# Altium PCB PCB1.PcbDoc
Units mm, origin at the board's own origin, x right, y up, seen from the top; angles counter-clockwise.
Board outline 25 x 15 mm, 4 copper layers (Top Layer, GND, VCC, Bottom Layer), stack 0.602 mm thick; 14 components, 27 nets, 98 pads, 50 vias.
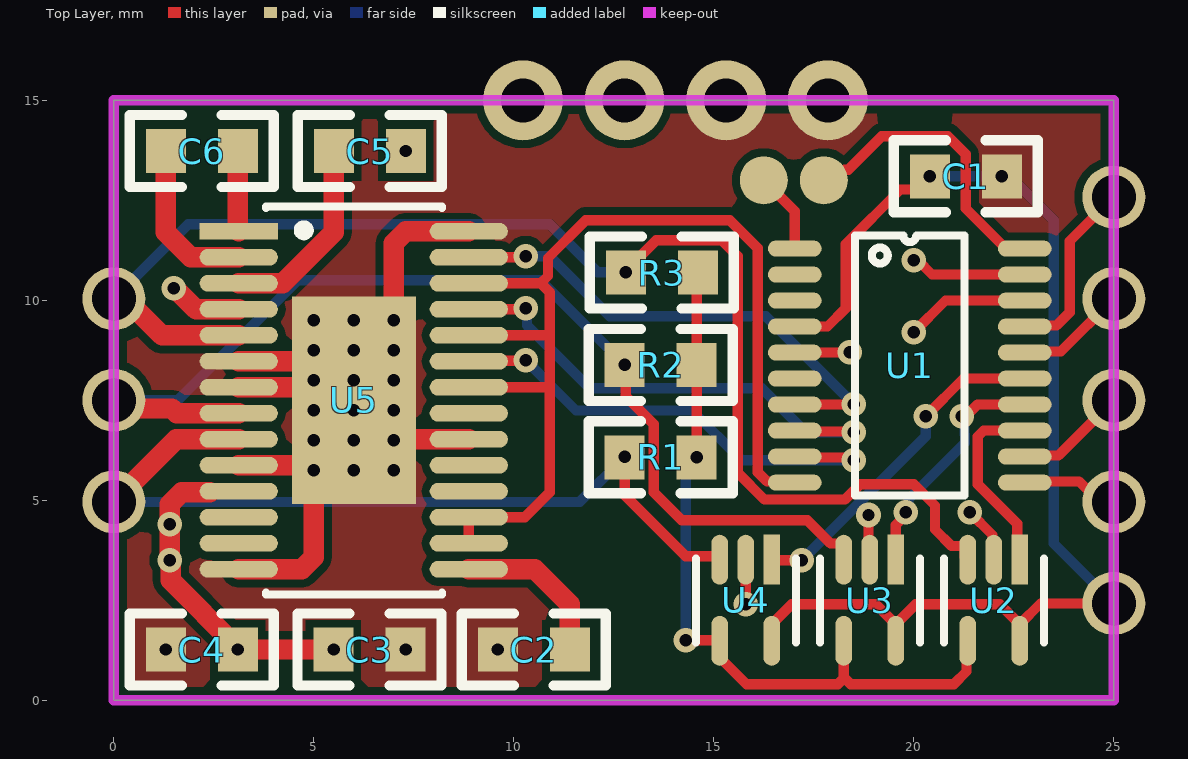
[diagram p0: Top Layer view]
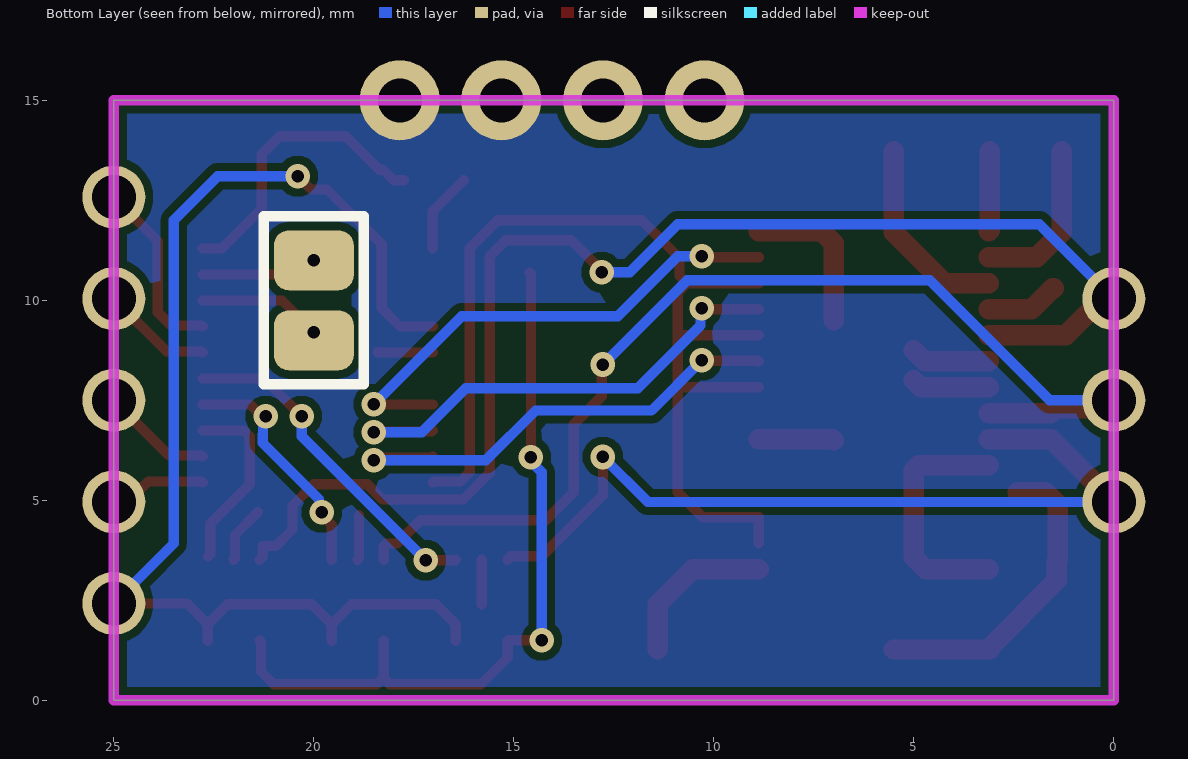
[diagram p1: Bottom Layer view, seen from below]
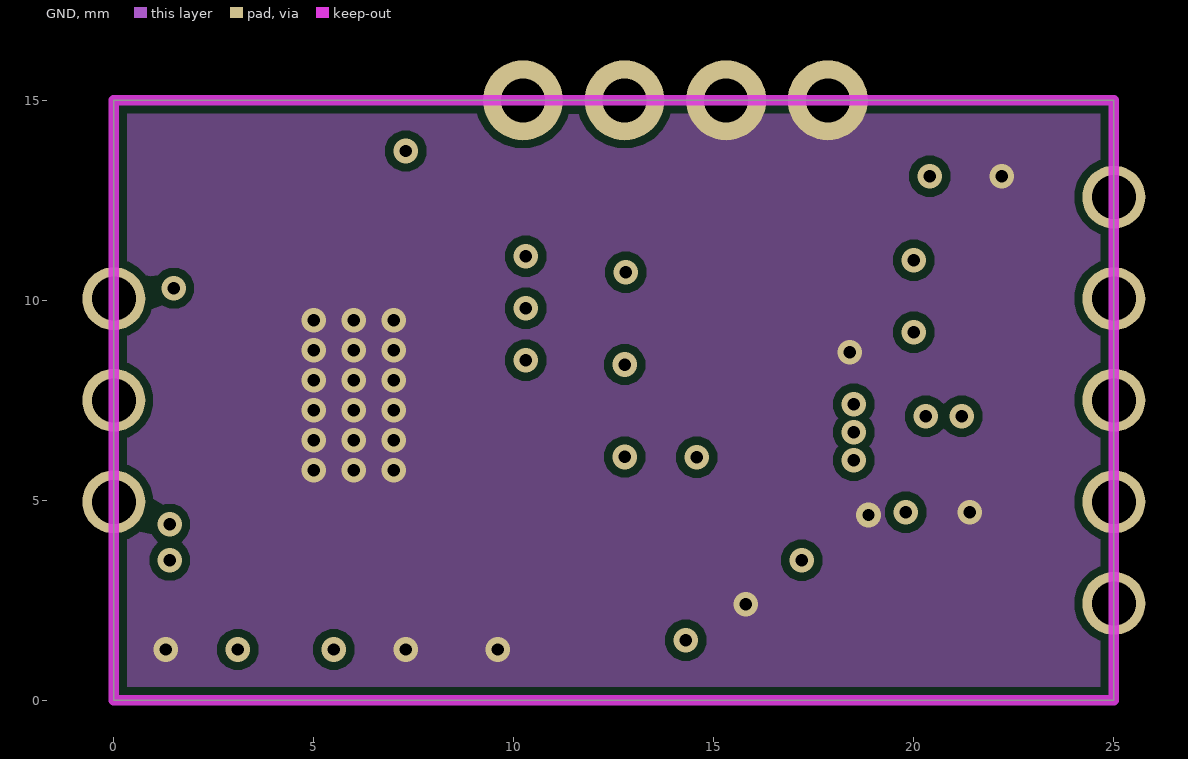
[diagram p2: GND]
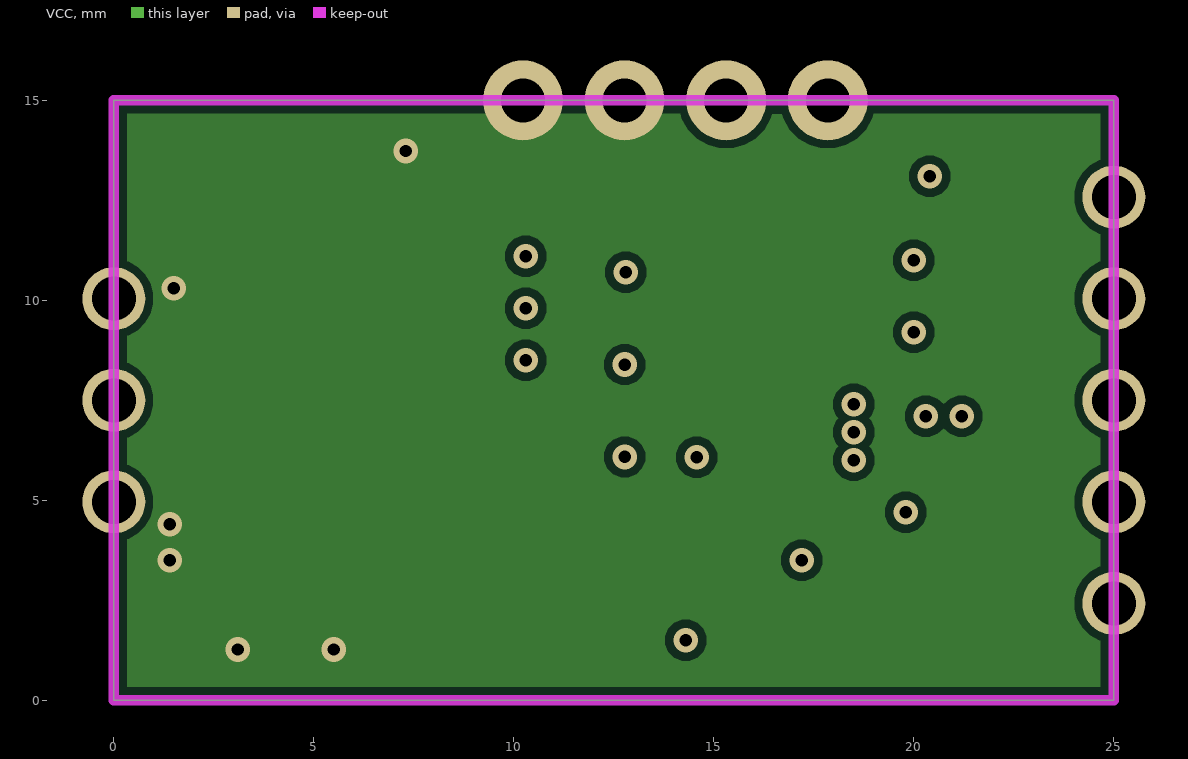
[diagram p3: VCC]
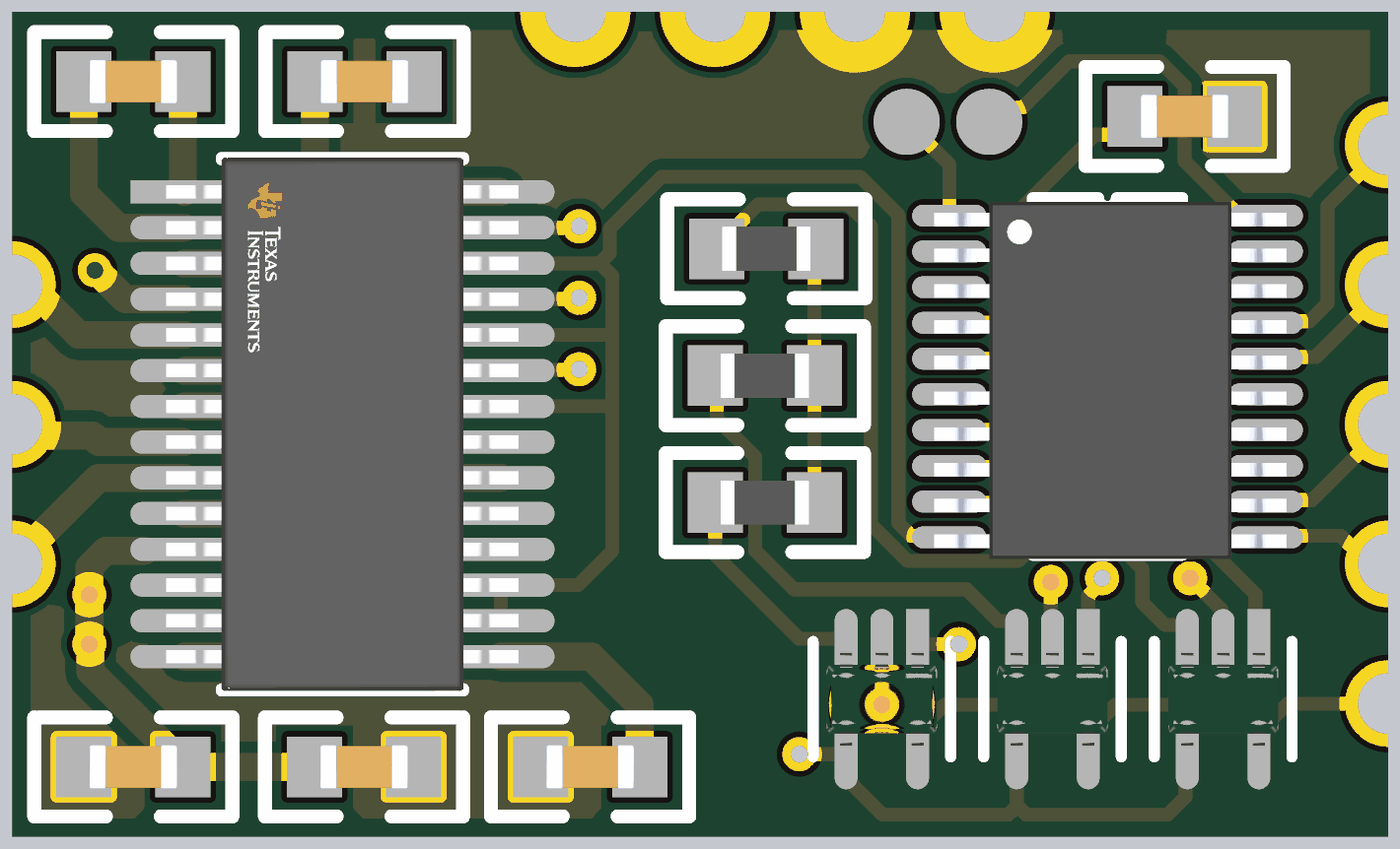
[diagram p4: 3D render of the assembled board from above, using the file's embedded part models]

## Layer stack, top to bottom
Top Solder: solder mask 0.0102, Solder Resist, Dk 3.5
Top Layer: signal copper 0.035
Dielectric 2: prepreg 0.0711, PP-006, Dk 4.1
GND: signal copper 0.035
Dielectric 1: dielectric 0.32, FR-4, Dk 4.8
VCC: signal copper 0.035
Dielectric 3: prepreg 0.0711, PP-006, Dk 4.1
Bottom Layer: signal copper 0.035
Bottom Solder: solder mask 0.0102, Solder Resist, Dk 3.5

## Board outline
0,0 0,15 25,15 25,0

## Design rules (kind name [scope] priority, off if disabled: settings)
Clearance [All] p1: gap=0 ignorepadtopadclearanceinfootprint=FALSE except(0.1: Arc-Arc Arc-Track Arc-SMDPad Arc-Via Track-Track Track-SMDPad Track-Via; 0.2: Arc-Fill Arc-Poly Arc-Region Track-Fill Track-Poly Track-Region SMDPad-Fill SMDPad-Poly SMDPad-Region THPad-Fill THPad-Poly THPad-Region Via-Fill Via-Poly Via-Region Fill-Fill Fill-Poly Fill-Region Poly-Poly Poly-Region Region-Region)
ComponentClearance [All] p1: gap=0.254 collisioncheckmode=3 verticalgap=0.1 showdistances=FALSE
HoleToHoleClearance [All] p1: gap=0.1 allowstackedmicrovias=TRUE
MinimumSolderMaskSliver [All] p1: minsoldermaskwidth=0.03
NetAntennae [All] p1: netantennaetolerance=999
PlaneConnect [All] p1: planeconnectstyle=Direct reliefexpansion=0.508 reliefentries=4 reliefconductorwidth=0.254 reliefairgap=0.254
PolygonConnect [All] p1: connectstyle=Direct reliefconductorwidth=0.254 reliefentries=4 polygonreliefangle="90 Angle" airgapwidth=0.254
RoutingVias [All] p1: holewidth=0.711 width=1.27 viastyle="Through Hole" minholewidth=0.711 minwidth=1.27 maxholewidth=0.711 maxwidth=1.27
SilkToSilkClearance [All] p1: silktosilkclearance=0.01
SilkToSolderMaskClearance [IsPad] p1: minsilkscreentomaskgap=0.1 clearancetoexposedcopper=TRUE
SolderMaskExpansion [All] p1: expansion=0.102 istentingtop=FALSE
SupplyNets "Schematic Supply Nets_2" [InNet('VCC')] p1: voltage=0.000
SupplyNets "Schematic Supply Nets_1" [InNet('+3V3')] p2: voltage=0.000
SupplyNets "Schematic Supply Nets" [InNet('GND')] p3: voltage=0.000
Width [All] p1: maxlimit=9 minlimit=0.254 preferedwidth=0.254
23 further rules are at their usual default settings.

## Components (designator, comment, footprint, x,y, rotation, side; value= is the part's Value field where it differs from the comment)
C1 "100nF" "CAPACITOR 0603" 21.3,13.1 r180 top
C2 "470nF" "CAPACITOR 0603" 10.5,1.269 r180 top
C3 "22uF" "CAPACITOR 0603" 6.392,1.269 r180 top
C4 "100nF" "CAPACITOR 0603" 2.2,1.269 r0 top
C5 "100nF" "CAPACITOR 0603" 6.4,13.731 r180 top
C6 "10nF" "CAPACITOR 0603" 2.2,13.731 r180 top
R1 "100kΩ" "RESISTOR 0603" 13.673,6.075 r180 top
R2 "100kΩ" "RESISTOR 0603" 13.673,8.383 r180 top
R3 "100kΩ" "RESISTOR 0603" 13.7,10.692 r180 top
U1 "STM32G031F6P6" TSSOP20 19.9,8.369 r0 top
U2 "TLV3201AIDCKT" SC70 22,2.5 r270 top
U3 "TLV3201AIDCKT" SC70 18.9,2.5 r270 top
U4 "TLV3201AIDCKT" SC70 15.8,2.5 r270 top
U5 "DRV8313PWPR" FP-PWP0028C-IPC_A 6,7.5 r0 top locked

## Footprints (in the part's own frame and the unit in brackets; to place one, negate y for a bottom-side part, rotate by r counter-clockwise, add the part's x,y. Pads: shape width x height; smd on the part's side, far side on the other; paste and mask are expansions set on the pad)
"CAPACITOR 0603" [mm]
  rect 1x1.1 smd: 1(-0.9,0) 2(0.9,0)
  silkscreen extent -1.8,-0.9 1.8,0.9, body extent -0.8,-0.4 0.8,0.4, height 0.9
FP-PWP0028C-IPC_A [mm]
  rect 1.955x0.421 smd paste+0 mask+0: 1(-2.875,4.225)
  rrect100% 1.955x0.421 smd paste+0 mask+0: 2(-2.875,3.575) 3(-2.875,2.925) 4(-2.875,2.275) 5(-2.875,1.625) 6(-2.875,0.975) 7(-2.875,0.325) 8(-2.875,-0.325) 9(-2.875,-0.975) 10(-2.875,-1.625) 11(-2.875,-2.275) 12(-2.875,-2.925) 13(-2.875,-3.575) 14(-2.875,-4.225) 15(2.875,-4.225) 16(2.875,-3.575) 17(2.875,-2.925) 18(2.875,-2.275) 19(2.875,-1.625) 20(2.875,-0.975) 21(2.875,-0.325) 22(2.875,0.325) 23(2.875,0.975) 24(2.875,1.625) 25(2.875,2.275) 26(2.875,2.925) 27(2.875,3.575) 28(2.875,4.225)
  rect 3.1x5.18 smd paste-1000 mask+0: 29(0,0)
  silkscreen extent -2.2,-4.85 2.2,4.85, body extent -3.2,-4.85 3.2,4.85, height 1.2
"RESISTOR 0603" [mm]
  rect 1x1.1 smd: 1(-0.9,0) 2(0.9,0)
  silkscreen extent -1.8,-0.9 1.8,0.9, body extent -0.8,-0.4 0.8,0.4, height 0.55
SC70 [mm]
  rect 1.25x0.416 smd paste+0 mask+0: 1(-1.014,0.65)
  rrect100% 1.25x0.416 smd paste+0 mask+0: 2(-1.014,0) 3(-1.014,-0.65) 4(1.014,-0.65) 5(1.014,0.65)
  silkscreen extent -1.05,-1.25 1.05,1.25, body extent -1.65,-1.33 1.65,1.33, height 0.25
TSSOP20 [mm]
  oval 1.35x0.4 smd: 1(-2.875,2.925) 2(-2.875,2.275) 3(-2.875,1.625) 4(-2.875,0.975) 5(-2.875,0.325) 6(-2.875,-0.325) 7(-2.875,-0.975) 8(-2.875,-1.625) 9(-2.875,-2.275) 10(-2.875,-2.925) 11(2.875,-2.925) 12(2.875,-2.275) 13(2.875,-1.625) 14(2.875,-0.975) 15(2.875,-0.325) 16(2.875,0.325) 17(2.875,0.975) 18(2.875,1.625) 19(2.875,2.275) 20(2.875,2.925)
  silkscreen extent -1.37,-3.25 1.37,3.25, body extent -3.15,-3.32 3.25,3.18, height 1.2

## Part data
C1 C2 C3 C4 C5 C6: library part "Capacitor 0603", "Generic 0603 Capacitor"
R1 R2 R3: library part "Resistor 0603", "Generic 0603 Resistor"
U2 U3 U4: "IC COMPARATOR RRI SGL SC70-5", Case/Package=SC, Input Bias Current=5nA, Input Offset Voltage (Vos)=5mV, Max Operating Temperature=125°C, Max Supply Current=40uA, Max Supply Voltage=5.5V, Min Operating Temperature=-40°C, Min Supply Voltage=2.7V, Nominal Supply Current=50uA, Package Quantity=250, Power Supply Rejection Ratio (PSRR)=85dB, Common Mode Rejection Ratio=70dB, Contact Plating=Gold, Height=1mm, Hysteresis=1.2mV, Lead Free="Lead Free", Length=2.15mm, Max Input Current=5nA, Mount="Surface Mount", Number of Channels=1, Number of Elements=1, Number of Pins=5, Output Type=PUSH-PULL, Packaging="Tape and Reel", Propagation Delay=50ns, Quiescent Current=40uA, Radiation Hardening=No, REACH SVHC="No SVHC", Response Time=40ns, RoHS Compliant=Yes, Series=-, Supply Current=50uA, Type="General Purpose", Width=1.4mm
U5: library part CMP-04915-000025-1, "IC MOTOR DRIVER 8V-60V 28HTSSOP", Case/Package=HTSSOP, Max Operating Temperature=125°C, Max Supply Voltage=60V, Min Operating Temperature=-40°C, Min Supply Voltage=8V, Output Current=1.75A, Package Quantity=2000, Interface=Parallel, Lead Free="Lead Free", Logic Function="AND GATE", Mount="Surface Mount", Number of Outputs=1, Number of Pins=28, Packaging="Tape and Reel", Series=-

## Free pads (board coordinates)
  round 1.575 hole 1.1: 10(0,4.96) 10(0,7.5) 10(0,10.04) 10(25,2.42) 10(25,4.96) 10(25,7.5) 10(25,10.04) 10(25,12.58)
  round 2 hole 1.1: 10(10.23,15) 10(12.77,15) 10(15.31,15) 10(17.85,15)
  round 1.2 smd: 11(16.25,13) 11(17.75,13)
  rrect50% 2x1.5 smd far side: 11(20,9) 11(20,11)

## Via types
v1: diameter 0.62, hole 0.31, Top Layer to GND, 26 vias
v2: diameter 0.62, hole 0.31, Top Layer to Bottom Layer, 18 vias
v3: diameter 0.62, hole 0.31, Top Layer to VCC, 6 vias

## Nets (pads, with @x,y where several pads share a name; then routed paths per layer and width w, separated by ;. In a path a pad name is that pad's centre, name@x,y a point inside that pad or via, vN(x,y) a via of type N, cw(c..) or ccw(c..) an arc to the next point about the centre after c; other vN are vias at no path point)
+3V3: C1.2 pad.10@25,2.42 U1.4 U2.5 U3.5 U4.5 | length 30.9
  Top Layer w0.254: U4.5 16.45,1.904 16.946,2.4 19.051,2.4 19.55,1.901 U3.5 19.55,1.904 20.046,2.4 22.154,2.4 U2.5@22.65,1.904 ; U1.4 17.844,9.344 18.3,9.8 18.3,11.4 19.668,12.768 20.068,12.768 v2(20.4,13.1) ; U2.5 U2.5@22.65,1.904 ; pad.10@25,2.42 23.166,2.42 U2.5@22.65,1.904
  Bottom Layer w0.254: v2(20.4,13.1) 22.4,13.1 23.5,12 23.5,3.92 pad.10@25,2.42
GND: C1.1 C2.2 C3.1 C4.1 pad.10@15.31,15 pad.10@17.85,15 U1.5 U2.2 U3.2 U4.2 U5.6 U5.7 U5.10 U5.14 U5.20 U5.28 U5.29 | length 20.9
  Top Layer w0.254: v1(15.8,2.4) U4.2 ; U1.5 17.028,8.697 18.397,8.697 v1(18.4,8.7) ; v1(18.869,4.631) 18.869,3.545 U3.2 ; v1(21.4,4.7) 21.969,4.131 21.969,3.545 U2.2
  Top Layer w0.508: U5.14 4.702,3.275 5,3.573 v1(5,5.75) 4.875,5.875 U5.10 ; U5.7 4.825,7.825 v1(5,8) ; U5.6 4.725,8.475 v1(5,8.75) ; v1(7,6.5) 7.025,6.525 U5.20 ; v1(7,9.5) 7,11.427 7.298,11.725 U5.28
  other v1: 1.3,1.269 7.3,1.269 9.6,1.269 6,5.75 7,5.75 5,6.5 6,6.5 5,7.25 6,7.25 7,7.25 6,8 7,8 6,8.75 7,8.75 5,9.5 6,9.5 22.2,13.1
NetC2_1: C2.1 U5.15 | length 4
  Top Layer w0.508: U5.15 10.525,3.275 10.699,3.101 11.4,2.4 C2.1
NetC5_2: C5.2 U5.3 | length 4.9
  Top Layer w0.508: U5.3 4.225,10.425 5.5,11.7 C5.2
NetC6_1: C6.1 U5.1 | length 2
  Top Layer w0.508: C6.1 3.1,11.75 U5.1
NetC6_2: C6.2 U5.2 | length 4.1
  Top Layer w0.508: C6.2 1.3,11.7 1.925,11.075 U5.2
NetR1_1: R1.1 R2.1 R3.1 U2.4 U3.4 U4.4 | length 19
  Top Layer w0.254: v2(14.3,1.5) 15.136,1.5 U4.4 15.15,1.069 15.819,0.4 18.1,0.4 18.25,0.55 U3.4 ; v2(14.573,6.075) R2.1 14.573,10.665 R3.1 ; 18.274,0.55 18.424,0.4 21,0.4 21.319,0.719 21.319,1.455 U2.4
  Bottom Layer w0.254: v2(14.3,1.5) 14.3,5.703 14.573,5.976 v2(14.573,6.075)
NetR1_2: pad.10@0,4.96 R1.2 U4.3 U5.9 | length 21
  Top Layer w0.254: v2(12.773,6.083) 12.773,5.127 14.3,3.6 15.075,3.6 15.15,3.525 U4.3
  Top Layer w0.508: pad.10@0,4.96 1.565,6.525 U5.9
  Bottom Layer w0.254: pad.10@0,4.96 11.65,4.96 v2(12.773,6.083)
NetR2_2: pad.10@0,7.5 R2.2 U3.3 U5.8 | length 27.3
  Top Layer w0.254: v2(12.773,8.392) 12.799,8.366 12.799,7.601 13.5,6.9 13.5,5.2 14.2,4.5 17.338,4.5 17.916,3.922 18.175,3.922 18.25,3.847 U3.3
  Top Layer w0.508: pad.10@0,7.5 0.204,7.296 1.454,7.296 1.575,7.175 U5.8
  Bottom Layer w0.254: pad.10@0,7.5 1.6,7.5 4.6,10.5 10.665,10.5 v2(12.773,8.392)
NetR3_2: pad.10@0,10.04 R3.2 U2.3 U5.5 | length 33.7
  Top Layer w0.254: R3.2@12.8,10.742 13.173,11.115 13.558,11.5 15.2,11.5 15.6,11.1 15.6,5.686 16.269,5.017 18.276,5.017 18.659,5.4 20,5.4 20.533,4.867 20.533,4.267 20.947,3.853 21.275,3.853 21.275,3.588 U2.3
  Top Layer w0.508: pad.10@0,10.04 0.289,10.04 1.204,9.125 U5.5
  Bottom Layer w0.254: pad.10@0,10.04 1.86,11.9 10.9,11.9 12.1,10.7 v2(12.8,10.7)
NetU1_1: pad.11@16.25,13 U1.1 | length 2
  Top Layer w0.254: pad.11@16.25,13 17.025,12.225 U1.1
NetU1_6: U1.6
NetU1_7: U1.7 U5.27 | length 12.6
  Top Layer w0.254: U5.27 10.275,11.075 v2(10.3,11.1) ; U1.7 17.028,7.397 18.497,7.397 v2(18.5,7.4)
  Bottom Layer w0.254: v2(10.3,11.1) 10.9,11.1 12.4,9.6 16.3,9.6 v2(18.5,7.4)
NetU1_8: U1.8 U5.25 | length 12.6
  Top Layer w0.254: U5.25 10.275,9.775 v2(10.3,9.8) ; U1.8 17.047,6.722 18.478,6.722 v2(18.5,6.7)
  Bottom Layer w0.254: v2(10.3,9.8) 10.335,9.765 10.335,9.365 11.9,7.8 16.2,7.8 17.3,6.7 v2(18.5,6.7)
NetU1_9: U1.9 U5.23 | length 12.2
  Top Layer w0.254: U5.23 8.888,8.487 10.287,8.487 v2(10.3,8.5) ; U1.9 17.053,6.066 18.434,6.066 v2(18.5,6)
  Bottom Layer w0.254: v2(10.3,8.5) 11.554,7.246 14.454,7.246 15.7,6 v2(18.5,6)
NetU1_10: U1.10 U5.16 U5.17 U5.22 U5.24 U5.26 | length 27.4
  Top Layer w0.254: U5.16 U5.17 10.275,4.575 10.9,5.2 10.9,7.825 ; U5.22 10.9,7.825 ; U5.24 10.9,9.125 ; U5.26 10.675,10.425 ; U1.10 16.997,5.472 16.328,5.472 16.1,5.7 16.1,11.3 15.4,12 11.8,12 10.856,11.056 10.856,10.606 10.675,10.425 ; 10.675,10.425 10.9,10.2 10.9,9.125 ; 10.9,7.825 10.9,9.125
NetU1_11: pad.10@25,4.96 U1.11 | length 2.4
  Top Layer w0.254: U1.11 22.803,5.472 24.131,5.472 24.643,4.96 pad.10@25,4.96
NetU1_12: pad.10@25,7.5 U1.12 | length 2.8
  Top Layer w0.254: U1.12 22.803,6.122 23.622,6.122 pad.10@25,7.5
NetU1_13: U1.13 U2.1 | length 4.7
  Top Layer w0.254: U2.1@22.636,3.595 22.586,3.645 22.586,4.414 21.6,5.4 21.6,6.595 21.749,6.744 U1.13
NetU1_14: U1.14 U3.1 | length 6
  Top Layer w0.254: U3.1 19.55,4.382 19.8,4.632 v2(19.8,4.7) ; v2(21.2,7.1) 21.299,7.1 21.596,7.397 22.772,7.397 U1.14
  Bottom Layer w0.254: v2(19.8,4.7) 19.87,4.77 19.87,5.024 21.277,6.431 21.277,6.641 21.27,6.648 21.27,7.03 v2(21.2,7.1)
NetU1_15: U1.15 U4.1 | length 8.5
  Top Layer w0.254: U4.1 16.464,3.5 v2(17.2,3.5) ; v2(20.3,7.1) 21.244,8.044 U1.15
  Bottom Layer w0.254: v2(17.2,3.5) 20.3,6.6 v2(20.3,7.1)
NetU1_16: pad.10@25,10.04 U1.16 | length 2.8
  Top Layer w0.254: U1.16 22.803,8.722 23.682,8.722 pad.10@25,10.04
NetU1_17: pad.10@25,12.58 U1.17 | length 4.6
  Top Layer w0.254: U1.17 22.803,9.372 23.572,9.372 23.9,9.7 23.9,11.48 pad.10@25,12.58
NetU1_18: pad.11@20,9 U1.18 | length 3.1
  Top Layer w0.254: v2(20,9.2) 20.794,9.994 U1.18
NetU1_19: pad.11@20,11 U1.19 | length 2.9
  Top Layer w0.254: v2(20,11) 20.099,11 20.455,10.644 U1.19
NetU1_20: pad.11@17.75,13 U1.20 | length 7.4
  Top Layer w0.254: pad.11@17.75,13 18.006,13 18.271,13.265 18.365,13.265 19.2,14.1 20.851,14.1 21.3,13.651 21.3,12.294 22.3,11.294 U1.20
VCC: C3.2 C4.2 C5.1 pad.10@10.23,15 pad.10@12.77,15 U5.4 U5.11 | length 9.7
  Top Layer w0.508: v3(1.5,10.3) 1.53,10.3 2.055,9.775 U5.4 ; U5.11@2.401,5.2 1.698,5.2 1.4,4.902 v3(1.4,4.4) v3(1.4,3.5) 1.421,3.479 1.421,2.997 3.1,1.319 v3(3.1,1.269) v3(5.5,1.269)
  other v3: 7.3,13.731
pads on no net: U1.2 U1.3 U5.12 U5.13 U5.18 U5.19 U5.21

## Polygon pours and split planes (outlines as drawn)
VCC on VCC "VCC_L03_P000" (solid, pour order 0): 0,0 0,15 25,15 25,0
GND on GND "GND_L02_P001" (solid, pour order 1): 0,0 0,15 25,15 25,0
GND on Bottom Layer "GND_L04_P003" (solid, remove dead copper, pour order 3): 0,0 0,15 25,15 25,0
GND on Top Layer "GND_L01_P002" (solid, remove dead copper, pour order 2): 0,15 0,0 25,0 25,15

## Keep-outs
Keep-Out Layer:
  lines w0.254: 0,0 25,0 25,15 20,15 0,15 0,0

## Silkscreen, mask and mechanical layers (free items; w line width, h text height)
Bottom Overlay:
  lines w0.254: 18.75,7.9 21.25,7.9 21.25,12.1 18.75,12.1 18.75,7.9
Mechanical 1:
  the board outline again, w0.254